# EAGLE board plant (EAGLE 6.4)
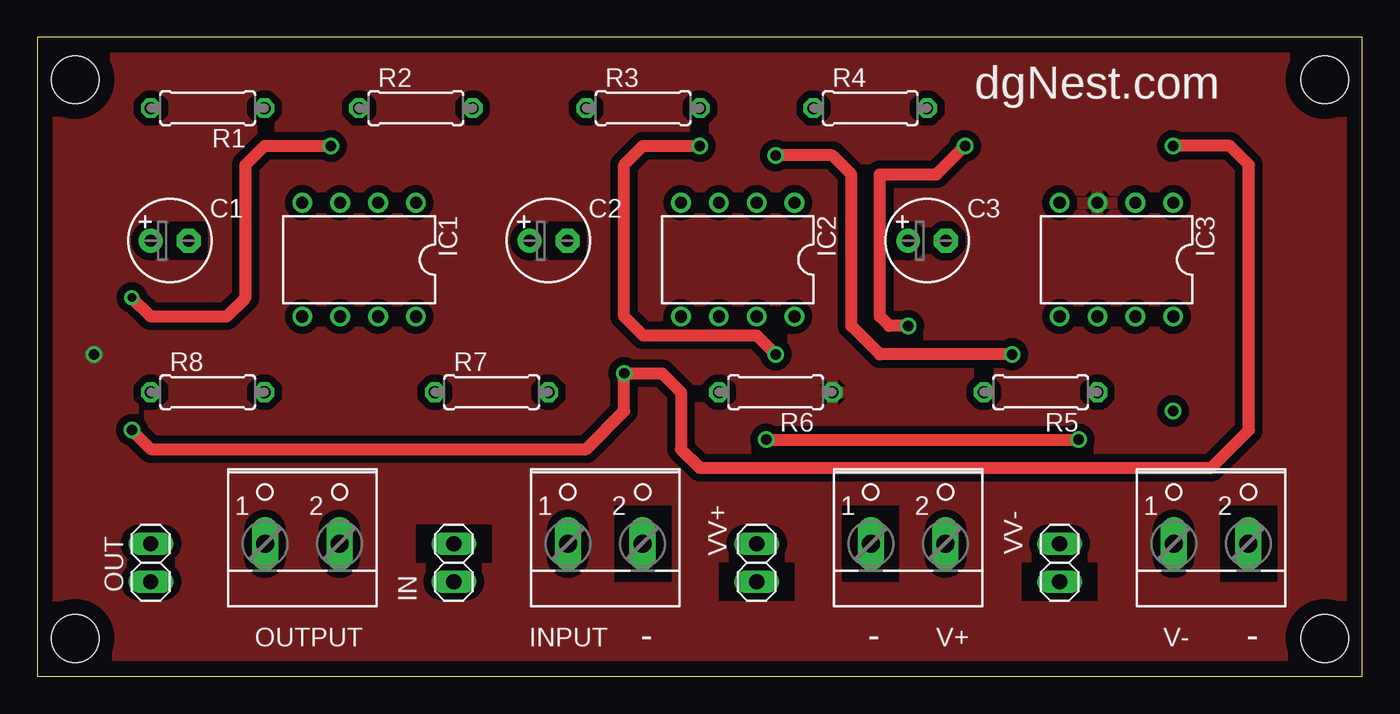
[diagram p0: board, top side]
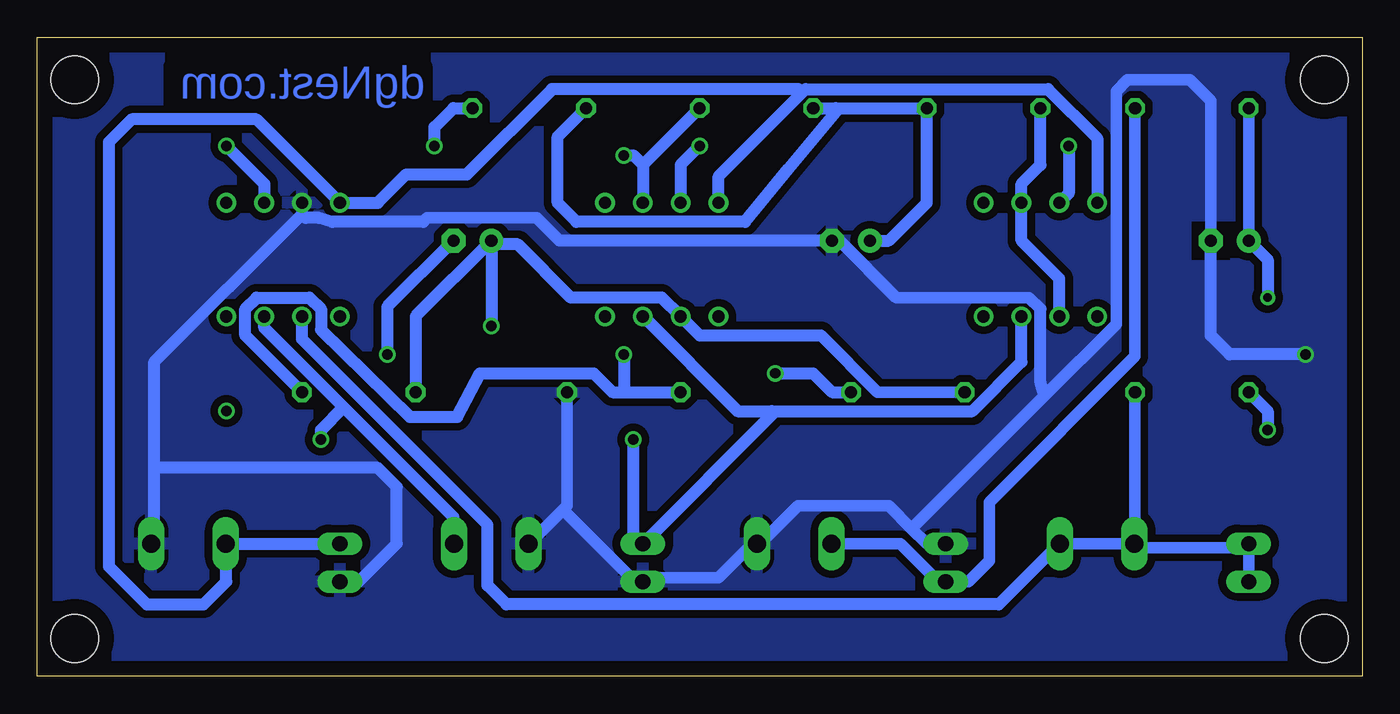
[diagram p1: board, bottom side, seen from below]

Size 88.88 x 42.85 mm. Coordinates in mm from the lower left corner, seen from the top.
Outline: 0,0 88.88,0 88.88,42.85 0,42.85 0,0
Copper layers (1*16): Top 0.035mm / dielectric 1.5mm / Bottom 0.035mm
Design rules "default *": minimum track width 30mil, minimum drill 24mil, track to track 20mil, track to pad 12mil, pad to pad 12mil, via to via 12mil, smd to smd 8mil, copper to edge 40mil, drill to drill 10mil, minimum pad ring 10mil, minimum via ring 8mil, stop-mask expansion 4mil, vias tented up to drill 0mil, thermal gap 10mil
Holes 3.2 mm at 2.54,2.54 86.36,2.54 86.36,40.01 2.54,40.01
tRestrict: area 38.7,6.4 to 42.5,11.4; area 54,6.4 to 57.8,11.4; area 79.4,6.4 to 83.2,11.4; area 25.4,7.6 to 30.5,10.2; area 45.7,5.1 to 50.8,7.6; area 66,5.1 to 71.1,7.6; area 8.9,27.9 to 11.4,30.5; area 34.3,27.9 to 36.8,30.5
bRestrict: area 8.9,27.9 to 11.4,30.5

## Footprints (pad centres in the part's own frame; a part is rotated, then mirrored left to right if it is on the bottom)
E2,5-6 = drill 0.813 pad 1.6: + -1.27,0 | drill 0.813 pad 1.6 octagon: - 1.27,0
DIL08 = drill 0.813 pad 1.27: 1 -3.81,-3.81; 2 -1.27,-3.81; 3 1.27,-3.81; 4 3.81,-3.81; 5 3.81,3.81; 6 1.27,3.81; 7 -1.27,3.81; 8 -3.81,3.81
1X02 = drill 1.016 long: 1 -1.27,0; 2 1.27,0
W237-102 = drill 1.194 long: 1 -2.5,-1.27; 2 2.5,-1.27
0207/7 = drill 0.813 octagon: 1 -3.81,0; 2 3.81,0

## Placement (x,y rotation side)
C1  4.7u  [E2,5-6]  8.89,29.21 0 top
C2  10u  [E2,5-6]  34.29,29.21 0 top
C3  1u  [E2,5-6]  59.69,29.21 0 top
IC1  LM741P  [DIL08]  21.59,27.94 180 top
IC2  LM741P  [DIL08]  46.99,27.94 180 top
IC3  LM741P  [DIL08]  72.39,27.94 180 top
IN  [1X02]  27.94,7.62 90 top
INPUT  [W237-102]  38.1,10.16 0 top
OUT  [1X02]  7.62,7.62 90 top
OUTPUT  [W237-102]  17.78,10.16 0 top
R1  22k  [0207/7]  11.43,38.1 180 top
R2  47k  [0207/7]  25.4,38.1 0 top
R3  68k  [0207/7]  40.64,38.1 0 top
R4  22k  [0207/7]  55.88,38.1 0 top
R5  10k  [0207/7]  67.31,19.05 180 top
R6  2.2k  [0207/7]  49.53,19.05 180 top
R7  1k  [0207/7]  30.48,19.05 0 top
R8  1k  [0207/7]  11.43,19.05 0 top
V+  [W237-102]  58.42,10.16 0 top
V-  [W237-102]  78.74,10.16 0 top
VV+  [1X02]  48.26,7.62 270 top
VV-  [1X02]  68.58,7.62 90 top

## Library data of the parts
C1-C3 R1-R8 = rcl
IC1-IC3 = linear
IN OUT VV+ VV- = pinhead
INPUT OUTPUT V+ V- = con-wago-500; MPN: 237-102; OC_FARNELL: unknown; OC_NEWARK: 70K9898

## Nets
+12V: IC1.7 IC2.7 IC3.7 V+.2 VV+.1
-12V: IC1.4 IC2.4 IC3.4 V-.1 VV-.2
GND: C1.- C2.- IC3.3 IN.2 INPUT.2 R6.1 V+.1 V-.2 VV+.2 VV-.1
N$1: C1.+ IC1.3 R1.2
N$2: IC1.2 IC1.6 R2.1
N$3: C2.+ R2.2 R3.1 R4.1
N$4: C3.- IC2.2 R3.2
N$5: C3.+ IC2.6 R4.2 R5.2 R7.1
N$7: IC3.2 R7.2 R8.1
N$8: IC3.6 OUT.1 OUT.2 OUTPUT.1 OUTPUT.2 R8.2
N$9: IC2.3 R5.1 R6.2
N$12: IN.1 INPUT.1 R1.1

## Tracks (layer width: path | path; a pad name or v marks a point on that pad's centre or on a via)
+12V  (via drill 0.7)
  Top 0.813: v48.9,15.88 v69.85,15.88
  Bottom 0.762: 26.16,17.78 22.86,21.08 | 39.62,17.53 39.62,17.78 | 60.96,10.67 60.96,8.89 V+.2
  Bottom 0.813: 22.86,21.08 IC1.7 | 26.16,17.78 39.62,17.78 41.91,17.78 IC2.7 | 39.62,17.53 VV+.1 48.9,8.89 v48.9,15.88 | IC3.7 73.66,23.37 68.33,18.03 | 60.96,10.67 68.33,18.03 | v69.85,15.88 69.85,16.51 68.33,18.03
-12V
  Bottom 0.762: 21.08,39.37 17.78,36.07 | 37.85,39.37 37.59,39.12
  Bottom 0.813: VV-.2 V-.1 76.2,8.85 76.2,6.35 77.72,4.83 81.53,4.83 84.07,7.37 84.07,35.81 82.55,37.34 74.17,37.34 IC3.4 66.04,31.75 64.14,33.66 60.07,33.66 54.36,39.37 37.85,39.37 | 17.78,36.07 IC1.4 | 21.08,39.37 37.34,39.37 37.59,39.12 43.18,33.53 IC2.4
GND  (via drill 0.7)
  Bottom 0.762: IC3.3 71.12,30.99 70.87,30.73 | 81.03,8.89 V-.2 | R6.1 53.34,11.43 53.59,11.18 | 53.59,11.18 55.88,8.89 V+.1 | 53.59,11.18 48.77,6.35 VV+.2 48.01,6.6 43.18,6.6 40.89,8.89 INPUT.2 40.39,8.89 37.85,11.43 31.75,11.43 30.23,9.91 | IN.2 29.21,8.89 30.23,9.91 | C1.- 10.16,38.61 11.56,40.01 15.75,40.01 16.51,39.24 16.51,23.62 21.34,18.8 30.23,9.91 | 35.05,29.21 C2.- | 31.24,25.4 22.35,25.4 21.59,24.64 | 69.09,30.48 69.98,30.73 | 62.99,30.48 62.74,30.73 55.37,30.73
  Bottom 0.813: 71.12,30.99 81.03,21.08 81.03,13.97 | 81.03,8.89 81.03,13.97 | 80.77,8.64 V-.2 | 31.24,25.4 35.05,29.21 | 21.59,24.64 21.59,19.68 21.34,18.8 | 69.98,30.73 70.87,30.73 | 62.99,30.48 69.09,30.48 | 55.37,30.73 53.85,29.21 C2.- | VV-.1 67.31,6.35 64.77,8.89 64.77,12.7 66.04,13.97 81.03,13.97 | v3.81,21.59 8.89,21.59 10.16,22.86 C1.-
  pour Top: -1.27,45.72 -1.27,0 90.17,-1.27 90.17,44.45
  pour Bottom: -1.27,45.72 -1.27,-1.27 91.44,-1.27 91.44,46.99
N$1  (via drill 0.6, 0.7)
  Top 0.813: v6.35,25.4 7.62,24.13 12.7,24.13 13.97,25.4 13.97,34.29 15.24,35.56 v19.68,35.56
  Bottom 0.762: C1.+ R1.2
  Bottom 0.813: C1.+ 6.35,27.94 v6.35,25.4 | v19.68,35.56 19.68,32.38 IC1.3
N$2
  Bottom 0.813: R2.1 21.59,34.29 22.86,33.02 IC1.2 22.86,29.21 20.32,26.67 IC1.6
N$3
  Bottom 0.762: 35.31,37.85 35.31,38.1
  Bottom 0.813: R3.1 35.31,38.1 R2.2 29.21,31.75 31.75,29.21 C2.+ | 35.31,37.85 38.48,34.04 41.4,30.48 52.7,30.48 53.98,31.75 53.98,36.2 R4.1
N$4  (via drill 0.7)
  Top 0.813: v65.41,21.59 56.52,21.59 54.61,23.5 54.61,33.66 53.34,34.92 v49.53,34.92
  Bottom 0.813: 48.26,34.29 IC2.2 | R3.2 48.26,34.29 | C3.- 65.41,24.77 v65.41,21.59 | v49.53,34.92 48.9,34.92 48.26,34.29
N$5  (via drill 0.7)
  Top 0.813: v58.42,23.5 57.15,23.5 56.52,24.13 56.52,33.66 60.33,33.66 v62.23,35.56
  Bottom 0.762: R7.1 32.51,19.05 36.32,22.86 | 58.17,28.96 C3.+
  Bottom 0.813: R5.2 63.5,24.13 C3.+ v58.42,23.5 | 36.32,22.86 44.45,22.86 IC2.6 46.99,25.4 53.09,25.4 56.64,28.96 58.17,28.96 | v62.23,35.56 62.23,36.83 60.96,38.1 R4.2
N$6  (via drill 0.7)
  other vias: 76.2,17.78
N$7  (via drill 0.7)
  Top 0.813: v6.35,16.51 7.62,15.24 36.83,15.24 39.37,17.78 v39.37,20.32 41.91,20.32 43.18,19.05 43.18,15.24 44.45,13.97 78.74,13.97 81.28,16.51 81.28,34.29 80.01,35.56 v76.2,35.56
  Bottom 0.813: R8.1 6.35,17.78 v6.35,16.51 | v39.37,20.32 36.83,20.32 35.56,19.05 R7.2 | v76.2,35.56 73.66,33.02 IC3.2
N$8
  Bottom 0.762: OUT.1 OUT.2 7.87,8.64 14.99,8.64 OUTPUT.1 | R8.2 15.24,8.26 OUTPUT.1 | 24.38,4.83 20.32,8.89 OUTPUT.2 OUTPUT.1
  Bottom 0.813: IC3.6 71.12,22.61 58.67,10.16 58.67,6.1 57.4,4.83 24.38,4.83
N$9  (via drill 0.7)
  Top 0.813: v44.45,35.56 40.64,35.56 39.37,34.29 39.37,24.13 40.64,22.86 48.26,22.86 v49.53,21.59
  Bottom 0.813: 49.53,19.05 50.29,19.05 51.56,20.32 59.18,20.32 60.71,17.4 63.88,17.4 69.85,23.24 69.85,24.64 70.61,25.4 74.17,25.4 74.93,24.64 74.93,22.86 R5.1 | 49.53,19.05 R6.2 | v44.45,35.56 45.72,34.29 IC2.3 | v49.53,21.59 49.53,19.05
N$12
  Bottom 0.762: R1.1 15.24,21.46 25.02,11.68 25.02,7.75 26.42,6.35 IN.1 28.83,6.73 30.99,8.89 INPUT.1

## Text on the board
Bottom: dgNest.com
tPlace: dgNest.com
tNames: - | - | -